# Altium PCB BQ24123 Recharger.PcbDoc
Units mil, origin at the board's own origin, x right, y up, seen from the top; angles counter-clockwise.
Board outline 2835 x 1670 mil, 2 copper layers (Top Layer, Bottom Layer); 25 components, 18 nets, 77 pads, 30 vias.
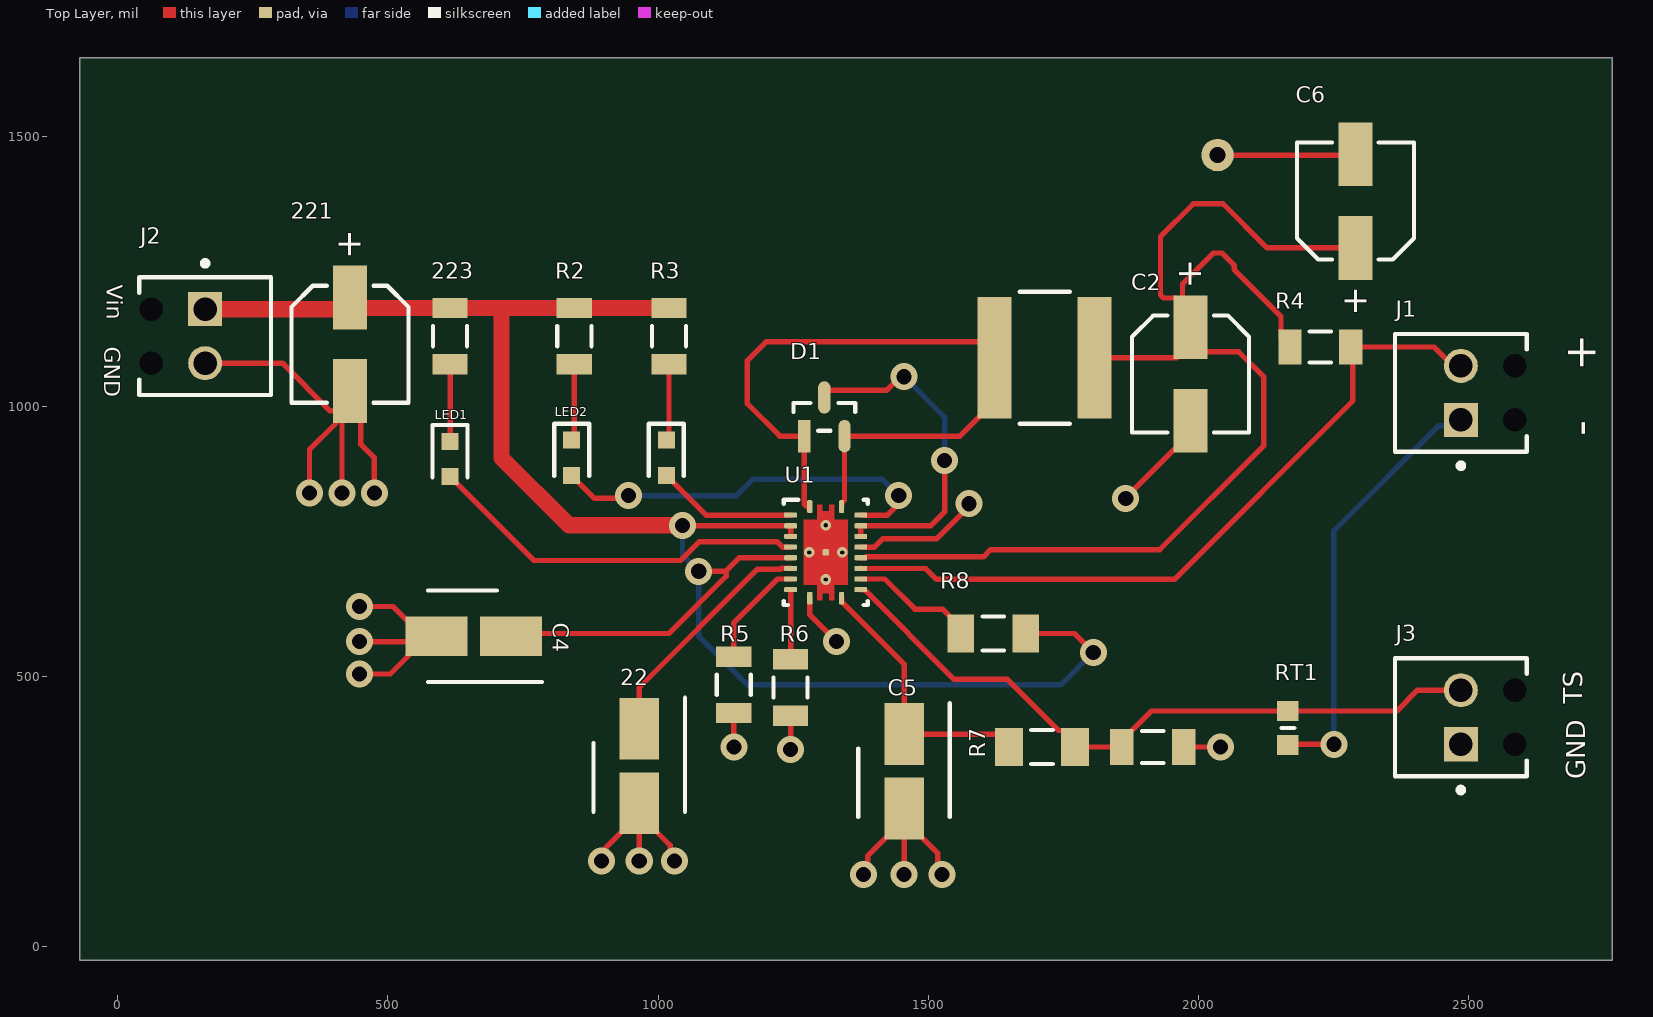
[diagram p0: Top Layer view]
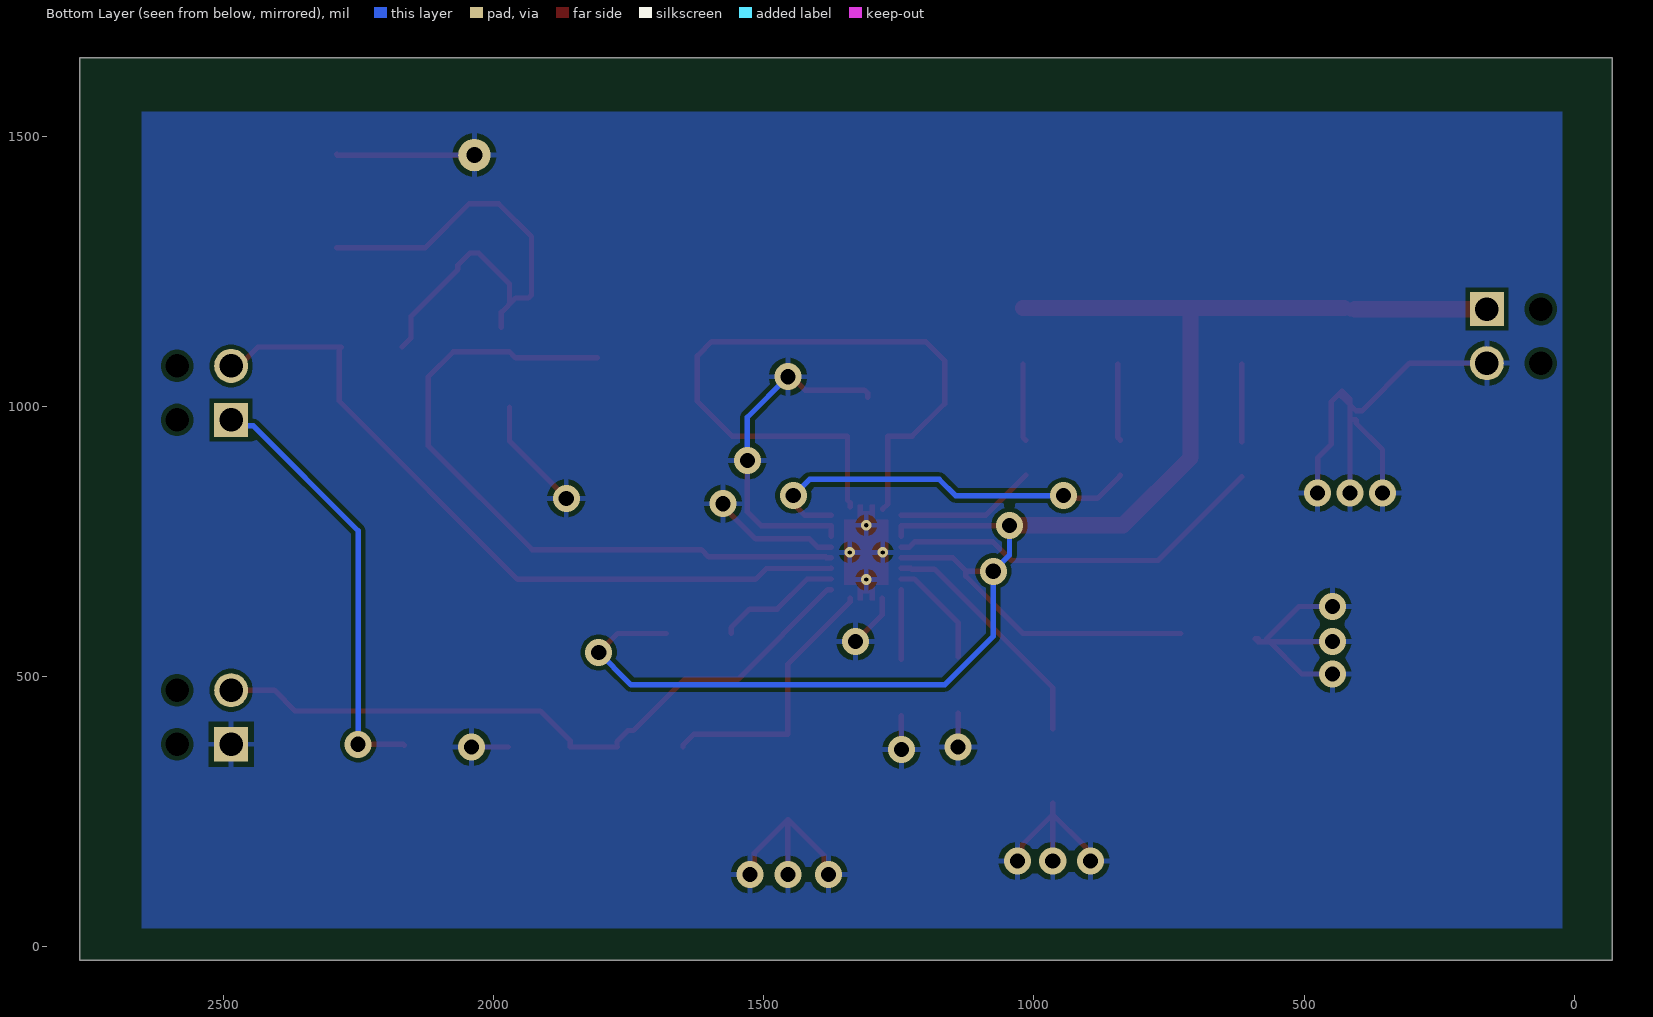
[diagram p1: Bottom Layer view, seen from below]
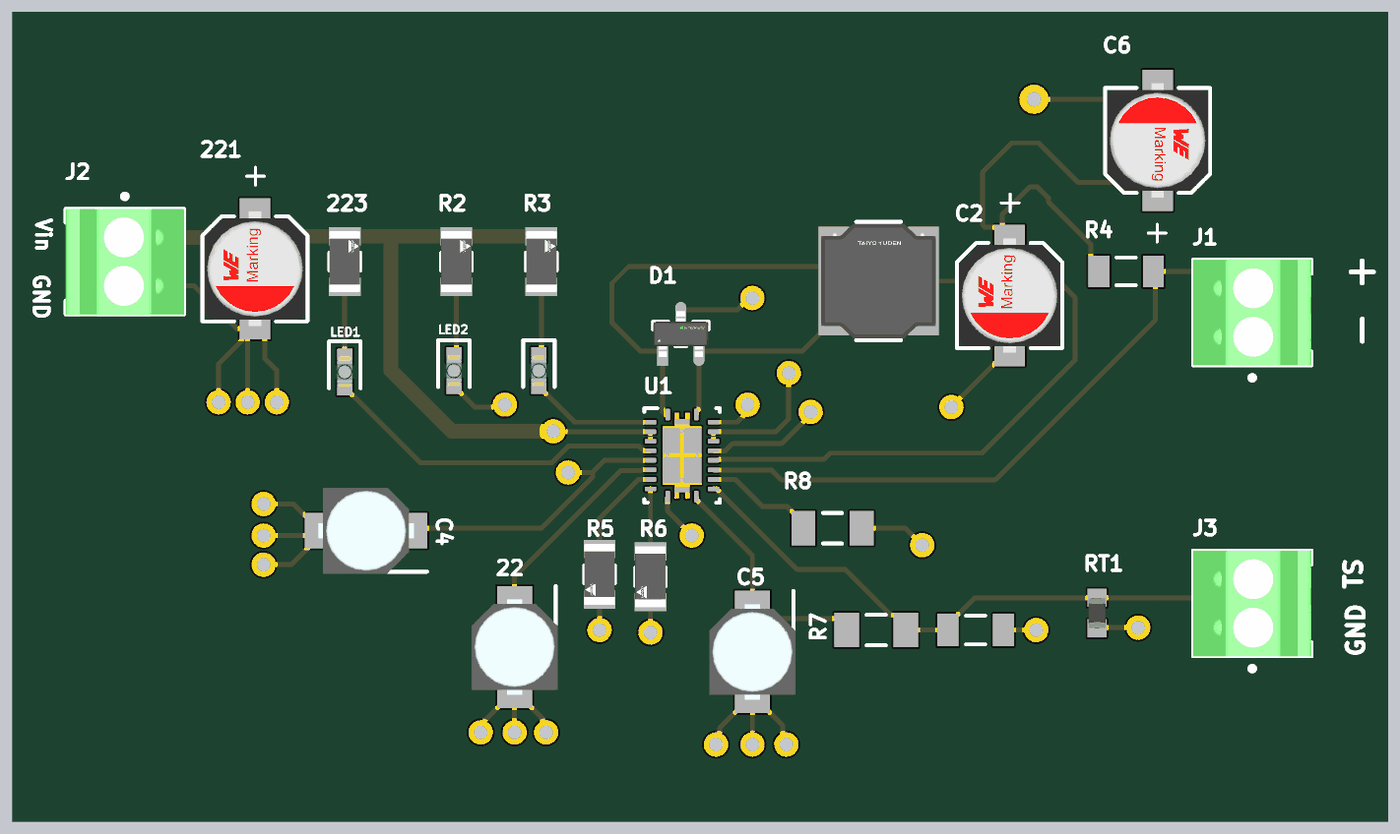
[diagram p2: 3D render of the assembled board from above, using the file's embedded part models]

## Layer stack, top to bottom
Top Solder: solder mask 0.4, Solder Resist, Dk 3.5
Top Layer: signal copper 1.4
Dielectric 1: dielectric 12.6, FR-4, Dk 4.8
Bottom Layer: signal copper 1.4
Bottom Solder: solder mask 0.4, Solder Resist, Dk 3.5

## Board outline
-70,-25 -70,1645 2765,1645 2765,-25

## Design rules (kind name [scope] priority, off if disabled: settings)
Clearance [All] p1: gap=8 ignorepadtopadclearanceinfootprint=FALSE
MinimumSolderMaskSliver [All] p1: minsoldermaskwidth=1
PolygonConnect [All] p1: connectstyle=Relief reliefconductorwidth=10 reliefentries=4 polygonreliefangle="90 Angle" airgapwidth=10
RoutingVias [All] p1: holewidth=28 width=50 viastyle="Through Hole" minholewidth=28 minwidth=50 maxholewidth=28 maxwidth=50
SilkToSilkClearance [All] p1: silktosilkclearance=0.5
SilkToSolderMaskClearance [IsPad] p1: minsilkscreentomaskgap=5 clearancetoexposedcopper=TRUE
SolderMaskExpansion [All] p1: expansion=4 istentingtop=FALSE
SupplyNets "Schematic Supply Nets_2" [InNet('PGND')] p1: voltage=0.000
SupplyNets "Schematic Supply Nets_1" [InNet('Battery Ground')] p2: voltage=0.000
Width [All] p1: maxlimit=40 minlimit=10 preferedwidth=10 minimp=50.000000 maximp=50.000000 favimp=50.000000
27 further rules are at their usual default settings.

## Classes and differential pairs
component class "BQ24123 Recharger": 22 223 C2 C4 C5 C6 D1 J1 J2 J3 LED1 LED2 R2 R3 R4 R5 R6 R7 R8 RT1 U1

## Components (designator, comment, footprint, x,y, rotation, side; value= is the part's Value field where it differs from the comment)
22 "UCB1V0R1MCL1GS" CAPAE430X730N 965,335 r270 top (schematic designator C3)
221 "865230542002" WCAP-AS5H_D5H5.5 430,1115 r90 top (schematic designator C?)
223 "CRCW12061K50FKEA" FP-CRCW1206-e3-IPC_C 615,1130 r90 top (schematic designator R1)
C2 "865230542002" WCAP-AS5H_D5H5.5 1985,1060 r90 top
C4 "UCB1V0R1MCL1GS" CAPAE430X730N 658.9,575 r180 top
C5 "UCB1V0R1MCL1GS" CAPAE430X730N 1455,325 r270 top
C6 "865230542002" WCAP-AS5H_D5H5.5 2290,1380 r270 top (schematic designator C?)
D1 "MMBZ18VALT1G" FP-318-08-IPC_B 1307.4,980.83 r90 top
J1 "1725656" PHOE-1725656-2 2485,1025 r90 top
J2 "1725656" PHOE-1725656-2 161.88,1130 r270 top
J3 "1725656" PHOE-1725656-2 2485,425 r90 top
L1 "NRS6045T100MMGK" FP-NR6045-MFG 1715,1090 r0 top
LED1 "APT1608CGCK" APT1608CGCK 615,902.52 r270 top
LED2 "APT1608CGCK" APT1608CGCK 840,905 r270 top
LED3 "APT1608CGCK" APT1608CGCK 1015,905 r270 top
R2 "CRCW12061K50FKEA" FP-CRCW1206-e3-IPC_C 845,1130 r90 top
R3 "CRCW12061K50FKEA" FP-CRCW1206-e3-IPC_C 1020,1130 r90 top
R4 "ERJ8BSFR10V" RESC3216X70X50NL05T20 2225,1110 r0 top
R5 "CRCW12067K50FKEA" FP-CRCW1206-e3-IPC_C 1140,485 r270 top
R6 "CRCW12067K50FKEA" FP-CRCW1206-e3-IPC_C 1245,480 r270 top
R7 "CRCW12069K31FKEA" RESC3216X60X45ML10T20 1710.11,370 r180 top
R8 "RC1206FR-0710KL" RESC3116X65X40ML10T20 1620,580 r0 top
RT1 "B57321V2103J060" THRMC1608X90N 2165,405 r90 top
U1 "BQ24123RHLR" RHL0020A_V 1310,730 r0 top
? "CRCW1206442KFKEA" RESC3216X60X45NL10T20 1915,370 r0 top

## Footprints (in the part's own frame and the unit in brackets; to place one, negate y for a bottom-side part, rotate by r counter-clockwise, add the part's x,y. Pads: shape width x height; smd on the part's side, far side on the other; paste and mask are expansions set on the pad)
APT1608CGCK [mm]
  rect 0.8x0.8 smd: 1(-0.825,0) 2(0.825,0)
  silkscreen extent -1.6,-0.82 0.85,0.82, body extent -0.8,-0.4 0.8,0.4, height 0.95
CAPAE430X730N [mm]
  rect 2.9x1.85 smd: 1(-1.75,0) 2(1.75,0)
  silkscreen extent -3.2,-2.15 2.15,2.15, body extent -2.5,-2.25 2.5,2.25, height 7.3
FP-318-08-IPC_B [mm]
  rect 1.524x0.578 smd paste+0 mask+0: 1(-0.91,0.95)
  rrect100% 1.524x0.578 smd paste+0 mask+0: 2(-0.91,-0.95) 3(0.91,0)
  silkscreen extent -0.65,-1.45 0.65,1.45, body extent -1.92,-1.7 1.92,1.7, height 0.25
FP-CRCW1206-e3-IPC_C [mil]
  rect 37.64x65.28 smd paste+0 mask+0: 1(-52.21,0) 2(52.21,0)
  silkscreen extent -19,-31 19,31, body extent -75,-38 75,38, height 10
FP-NR6045-MFG [mm]
  rect 1.6x5.7 smd paste+0 mask+0: 1(-2.35,0) 2(2.35,0)
  silkscreen extent -1.17,-3.1 1.17,3.1, body extent -3.25,-3.2 3.25,3.2, height 0.25
PHOE-1725656-2 [mm] "Connector, 2-Leads, Body 6.2x5.4mm, Pitch 2.54mm"
  rect 1.6x1.6 hole 1.1: 1(-1.27,0)
  round 1.6 hole 1.1: 2(1.27,0)
  round 0 hole 1.1 unplated: MH1(-1.27,-2.54) MH2(1.27,-2.54)
  silkscreen extent -3.54,-3.1 2.77,3.1, body extent -2.77,-3.1 2.77,3.1, height 9
RESC3116X65X40ML10T20 [mm] "Chip Resistor, 2-Leads, Body 3.10x1.60mm, IPC Low Density"
  rect 1.25x1.8 smd: 1(-1.525,0) 2(1.525,0)
  silkscreen extent -0.5,-0.8 0.5,0.8, body extent -1.6,-0.85 1.6,0.85, height 0.65
RESC3216X60X45ML10T20 [mm] "Chip Resistor, 2-Leads, Body 3.20x1.60mm, IPC Low Density"
  rect 1.3x1.8 smd: 1(-1.55,0) 2(1.55,0)
  silkscreen extent -0.5,-0.8 0.5,0.8, body extent -1.65,-0.85 1.65,0.85, height 0.6
RESC3216X60X45NL10T20 [mm] "Chip Resistor, 2-Leads, Body 3.20x1.60mm, IPC Medium Density"
  rect 1.1x1.7 smd: 1(-1.45,0) 2(1.45,0)
  silkscreen extent -0.5,-0.75 0.5,0.75, body extent -1.65,-0.85 1.65,0.85, height 0.6
RESC3216X70X50NL05T20 [mm] "Chip Resistor, 2-Leads, Body 3.20x1.60mm, IPC Medium Density"
  rect 1.1x1.65 smd: 1(-1.425,0) 2(1.425,0)
  silkscreen extent -0.5,-0.72 0.5,0.72, body extent -1.63,-0.82 1.62,0.82, height 0.7
RHL0020A_V [mm] "QFN, 20-Leads, Body 4.5x3.5mm, Pitch 0.5mm, Thermal Pad 3.05x2.05mm, TI Recommended"
  rrect42% 0.24x0.6 smd: 1(-0.75,2.15) 10(-0.75,-2.15) 11(0.75,-2.15) 20(0.75,2.15)
  rrect42% 0.6x0.24 smd: 2(-1.65,1.75) 3(-1.65,1.25) 4(-1.65,0.75) 5(-1.65,0.25) 6(-1.65,-0.25) 7(-1.65,-0.75) 8(-1.65,-1.25) 9(-1.65,-1.75) 12(1.65,-1.75) 13(1.65,-1.25) 14(1.65,-0.75) 15(1.65,-0.25) 16(1.65,0.25) 17(1.65,0.75) 18(1.65,1.25) 19(1.65,1.75)
  rrect33% 0.3x0.3 smd paste-0.15 mask+0: 21(0,0)
  Top Layer region: 0.16,2.25 0.16,1.925 -0.16,1.925 -0.16,2.25 -0.39,2.25 -0.39,1.525 -1.025,1.525 -1.025,-1.525 -0.39,-1.525 -0.39,-2.25 -0.16,-2.25 -0.16,-1.925 0.16,-1.925 0.16,-2.25 0.39,-2.25 0.39,-1.525 1.025,-1.525 1.025,1.525 0.39,1.525 0.39,2.25
  silkscreen extent -1.98,-2.47 1.98,2.47, body extent -1.82,-2.33 1.83,2.32, height 1.01
THRMC1608X90N [mm]
  rect 0.95x1 smd: 1(-0.8,0) 2(0.8,0)
  silkscreen extent 0,-0.3 0,0.3, body extent -0.8,-0.45 0.8,0.45, height 0.8
WCAP-AS5H_D5H5.5 [mm] "Aluminum Electrolytic Capacitors, 5x5.5mm"
  rect 3x1.6 smd: 1(2.2,0) 2(-2.2,0)
  silkscreen extent -2.75,-2.75 2.75,2.75, body extent -3,-2.65 3,2.65, height 5.5

## Part data
22 C4 C5: "Capacitor Polarised", Manufacturer_Name=Nichicon, Mouser Part Number=647-UCB1V0R1MCL1GS, Datasheet Link=http://www.nichicon.co.jp/english/products/pdfs/e-ucb.pdf, Height=7.3mm, Manufacturer_Part_Number=UCB1V0R1MCL1GS, Mouser Price/Stock=https://www.mouser.co.uk/ProductDetail/Nichicon/UCB1V0R1MCL1GS/?qs=Wu4QelNNmeOHrkSeva4QtA%3D%3D
221 C2 C6: library part CMP-03913-53914689-1, "865230542002 WCAP-AS5H Aluminum Electrolytic Capacitors", Capacitance=10µF, Case/Package=Radial, Insulation Resistance=10MΩ, Leakage Current=3.5µA, Max Operating Temperature=105°C, Min Operating Temperature=-40°C, Ripple Current=25mA, Tolerance=20%, Voltage Rating=35V, Diameter=5mm, Height=5.5mm, Height - Seated (Max)=5.5118mm, Length=5.5mm, Life (Hours)=5000hours, Mount="Surface Mount", NexarPartId=53914689, Packaging="Tape & Reel (TR)", Polarity=Polar, REACH SVHC=Unknown, Ripple Current (AC)=25mA, RoHS=Compliant, Voltage Rating (DC)=35V, Width=5.3mm
223 R2 R3: library part CMP-02407-002229-1, "RES Thick Film, 1.5kΩ, 1%, 0.25W, 100ppm/°C, 1206", Case Code (Imperial)=1206, Case Code (Metric)=3216, Max Operating Temperature=155°C, Max Power Dissipation=250mW, Min Operating Temperature=-55°C, Package Quantity=10, Resistance=1.5kR, Temperature Coefficient=100ppm/°C, Tolerance=1%, Voltage Rating=200V, Case/Package=1206, Composition="Thick Film", Contact Plating=Tin, Depth=1.6mm, Features="Automotive AEC-Q200", Height=0.024inch, Lead Free="Lead Free", Length=3.2mm, Military Standard=Not, Number of Terminations=2, Packaging="Tape and Reel", Power Rating=250mW, Radiation Hardening=No, Termination=SMD/SMT, Voltage Rating (DC)=200V, Weight=0.000353oz, Width=0.063inch
D1: library part CMP-1061-00637-2, "TVS DIODE 14.5V 25V SOT23-3", Breakdown Voltage=17.1V, Case/Package=SOT-23-3, Clamping Voltage=25V, Leakage Current=50nA, Max Breakdown Voltage=18.9V, Max Operating Temperature=150°C, Max Power Dissipation=225mW, Max Surge Current=1.6A, Min Operating Temperature=-55°C, Operating Supply Voltage=14.5V, Package Quantity=1, Peak Pulse Power=40W, Power Line Protection=No, Test Current=1mA, Voltage Rating (DC)=18V, Composition=Zener, Contact Plating=Tin, Depth=1.3mm, Direction=Unidirectional, Element Configuration="Common Anode", ESD Protection=Yes, Height=1.01mm, Lead Free="Lead Free", Length=2.9mm, Max Reverse Leakage Current=50nA, Min Breakdown Voltage=17.1V, Number Of Channels=2, Number of Elements=2, Number of Pins=3, Number of Unidirectional Channels=2, Packaging="Tape and Reel", Peak Pulse Current=1.6A, Polarity=Unidirectional, Power Dissipation=40W, Radiation Hardening=No, REACH SVHC="No SVHC", Reverse Breakdown Voltage=17.1V, Reverse Standoff Voltage=14.5V, Termination=SMD/SMT, Width=1.4mm, Working Voltage=14.5V
J1 J2 J3: library part CMP-2000-05299-1, "Male Header, Pitch 2.54 mm, 1 x 2 Position, Height 9 mm, Tail Length 3.5 mm", Colour=Green, Manufacturer="Phoenix Contact", Content=250pc(s), Datasheet URL=http://datasheet.octopart.com/1725656-Phoenix-Contact-datasheet-5302866.pdf, Datasheet Version=Apr-08, Industrial packaging=Yes, Manufacturer part No.=1725656, Manufacturer URL=http://www.phoenixcontact.com/, Number of contacts=2, Pitch=2.54mm, Type=MPT0,5/2-2,54
L1: library part CMP-14484-001321-1, "Shielded Wirewound Inductor 10uH 20% 2.8A 59.8mΩ SMD", Case/Package=Nonstandard, Current Rating=2.4A, DC Resistance (DCR)=59.8mR, Inductance=10uH, Inductance tolerance=20%, Max DC Current=3.1A, Max Operating Temperature=125°C, Min Operating Temperature=-25°C, Package Quantity=1500, Resistor Type=Wirewound, Self Resonant Frequency=12MHz, Test Frequency=100kHz, Core Material=Ferrite, Depth=6.2mm, Halogen Free="Halogen Free", Height=4.5mm, Height - Seated (Max)=0.177inch, Lead Free="Lead Free", Lead Pitch=4.7mm, Length=6mm, Mount="Surface Mount", Number of Pins=2, Packaging="Tape and Reel", Radiation Hardening=No, RMS Current (Irms)=2.4A, RoHS Compliant=Yes, Saturation Current=3.1A, Series=NRS, Shielding=Shielded, Termination=SMD/SMT, Tolerance=20%, Width=0.236inch
LED1 LED2 LED3: "LED", Manufacturer_Name=Kingbright, Mouser Part Number=604-APT1608CGCK, Arrow Part Number=APT1608CGCK, Arrow Price/Stock=https://www.arrow.com/en/products/apt1608cgck/kingbright?region=nac, Datasheet Link=https://componentsearchengine.com/Datasheets/1/APT1608CGCK.pdf, Height=0.75mm, Manufacturer_Part_Number=APT1608CGCK, Mouser Price/Stock=https://www.mouser.co.uk/ProductDetail/Kingbright/APT1608CGCK?qs=VdjlWU%2FzoOFSew86JUt6QA%3D%3D
R4: library part CMP-2003-00761-1, Manufacturer=Panasonic, Part Number=ERJ8BSFR10V
R5 R6: library part CMP-2003-02388-2, "RES Thick Film, 7.5kΩ, 1%, 0.25W, 100ppm/°C, 1206", Case Code (Imperial)=1206, Case Code (Metric)=3216, Max Operating Temperature=155°C, Max Power Dissipation=250mW, Min Operating Temperature=-55°C, Package Quantity=10, Resistance=7.5kR, Resistance Tolerance=1%, Resistor Type="Thick Film", Temperature Coefficient=100ppm/°C, Voltage Rating=200V, Case/Package=1206, Construction=Rectangular, Contact Plating=Tin, Depth=1.6mm, Features="Automotive AEC-Q200", Height=0.55mm, Lead Free="Lead Free", Length=3.2mm, Military Standard=Not, Number of Terminations=2, Packaging="Tape and Reel", Power Rating=250mW, Radiation Hardening=No, RoHS Compliant=Yes, Series=CRCW, Technology="THICK FILM", Termination=SMD/SMT, Tolerance=1%, Voltage Rating (DC)=200V, Weight=0.000353oz, Width=0.063inch, Working Voltage=200V
R7: library part CMP-2003-02443-1, Manufacturer="Vishay Dale", Part Number=CRCW12069K31FKEA
R8: library part CMP-1014-00623-2, "Chip Resistor, 10 KOhm, +/- 1%, 0.25 W, -55 to 155 degC, 1206 (3216 Metric), RoHS, Tape and Reel", Case Code (Imperial)=1206, Case Code (Metric)=3216, Manufacturer=Yageo, Max Operating Temperature=155degC, Min Operating Temperature=-55degC, Package Description="2-Pin Surface Mount Device, Body 3.1 x 1.6 mm", Package Quantity=5000, Package Reference=1206.0, Power Rating=250mW, Resistance=10KOhm, Temperature Coefficient=100ppm/degreesC, Tolerance=1%, Voltage Rating=200V, Case/Package=1206, Composition=ThickFilm, Datasheet URL=http://www.yageo.com/NewPortal/yageodocoutput?fileName=/pdf/R-Chip/PYu-RC_Group_51_RoHS_L_5.pdf, Datasheet Version="Rev. 5, 10/2016", Depth=1.6mm, Height=0.55mm, Lead Free=LeadFree, Length=3.1mm, Manufacturer URL=http://www.yageo.com/, Military Standard=Not, Packaging=TapeandReel, REACH SVHC=Unknown, RoHSCompliant=true, Termination=SMD/SMT, Width=1.6mm
RT1: "Thermistor", Manufacturer_Name=TDK, Mouser Part Number=871-B57321V2103J060, Arrow Part Number=B57321V2103J060, Arrow Price/Stock=https://www.arrow.com/en/products/b57321v2103j060/epcos-tdk, Datasheet Link=https://product.tdk.com/system/files/dam/doc/product/sensor/ntc/chip-ntc-thermistor/data_sheet/50/db/ntc/ntc_smd_standard_series_0603.pdf, Height=0.9mm, Manufacturer_Part_Number=B57321V2103J060
U1: library part CMP-0321-00131-2, "Synchronous Switch-Mode 2-Cell Li-Ion Charger with 2 A FET, Enhanced EMI Performance, 4.3 V, -40 to 85 degC, 20-pin QFN (RHL), Green (RoHS & no Sb/Br)", Manufacturer="Texas Instruments", Over Voltage Protection=N, ComponentLink1Description=Datasheet, ComponentLink1URL=http://www.ti.com/general/docs/lit/getliterature.tsp?genericPartNumber=BQ24123&fileType=pdf, DatasheetVersion=SLUS688G, Eco-Plan="Green (RoHS & no Sb/Br)", Lead Acid=N, Li-Ion=Y, Li-Polymer=Y, Mounting Technology="Surface Mount", NiCd=N, NiMH=N, PackageDescription="20-Leads Plastic Quad Flatpack No-Lead, 4.5 x 3.5 x 0.9 mm Body, 0.5 mm Pitch, Exposed Pad", PackageReference=RHL0020A, PackageVersion="revJ, Dec-2011", PartNumber=BQ24123RHLR, SubFamily="Battery Charge Management", Vin(Min)(V)=4.3
?: library part CMP-2003-02197-1, Manufacturer="Vishay Dale", Part Number=CRCW1206442KFKEA

## Free pads (board coordinates)
  round 60 hole 30: 3(2035,1465)

## Via types
v1: diameter 50, hole 28, Top Layer to Bottom Layer, 26 vias
v2: diameter 19.68, hole 7.87, Top Layer to Bottom Layer, 4 vias

## Nets (pads, with @x,y where several pads share a name; then routed paths per layer and width w, separated by ;. In a path a pad name is that pad's centre, name@x,y a point inside that pad or via, vN(x,y) a via of type N, cw(c..) or ccw(c..) an arc to the next point about the centre after c; other vN are vias at no path point)
"Battery Ground": J1.1 RT1.1 | length 800.5
  Top Layer w10: RT1.1 2166.5,375 v1(2250,375)
  Bottom Layer w10: v1(2250,375) 2250,770 2444.36,964.36 2474.36,964.36 J1.1
NetC2_1: C2.1 C6.1 L1.2 R4.1 U1.15 | length 2279
  Top Layer w10: U1.15 1375.24,720.43 1383.93,720.43 1385.34,721.84 1601.84,721.84 1615,735 1927.96,735 2120,927.04 2120,1055 2073.82,1101.18 1970,1101.18 1958.82,1090 L1.2 ; C2.1@1970,1189.17 1970,1226.69 2027.13,1283.82 2042.87,1283.82 2065.43,1261.26 2065.43,1253.39 2152.24,1166.57 2152.24,1126.65 R4.1 ; C2.1 1985,1174.17 1958.5,1200.67 1935.19,1200.67 1929.33,1206.53 1929.33,1314.33 1990,1375 2045,1375 2126.61,1293.39 C6.1
NetC3_1: 22.1 U1.7 | length 447.5
  Top Layer w10: 22.1 965,480 1184.06,699.06 1225.94,699.06 1227.35,700.47 U1.7
NetD1_1: D1.1 D1.2 L1.1 U1.1 U1.20 | length 1352.9
  Top Layer w10: U1.1@1279.65,810 1270,819.65 D1.1 1225,945 1165,1005 1165,1085 1200,1120 1595.98,1120 1622.48,1093.5 L1.1 1622.48,1009.29 1558.19,945 D1.2 1344.8,826.45 1339.53,821.18 U1.20
NetLED1_1: 223.1 LED1.1 | length 142.8
  Top Layer w10: LED1.1 223.1
NetLED1_2: LED1.2 U1.5 | length 713
  Top Layer w10: LED1.2 770.04,715 1041.07,715 1076.07,750 1220,750 1230.16,739.84 U1.5
NetLED2_1: LED2.1 R2.1 | length 142.4
  Top Layer w10: LED2.1 845,942.48 R2.1
NetLED2_2: LED2.2 U1.19 | length 743.3
  Top Layer w10: LED2.2 882.52,830 940,830 v1(945,835) ; U1.19 1423.89,798.89 1437.35,812.35 1437.35,827.35 v1(1445,835)
  Bottom Layer w10: v1(945,835) 1145,835 1175,865 1415,865 v1(1445,835)
NetLED3_1: LED3.1 R3.1 | length 142.4
  Top Layer w10: LED3.1 1020,942.48 R3.1
NetLED3_2: LED3.2 U1.2 | length 260.5
  Top Layer w10: LED3.2 1088.63,798.89 U1.2
NetR5_1: R5.1 U1.8 | length 201.3
  Top Layer w10: R5.1 1140,600 1220.78,680.78 U1.8
NetR6_1: R6.1 U1.9 | length 128.9
  Top Layer w10: R6.1 R6.1 U1.9
NetR8_1: R8.1 U1.13 | length 233.1
  Top Layer w10: U1.13 1419.22,680.78 1475,625 1525.79,625 1559.96,590.83 R8.1
PGND: 22.2 221.2 ?.2 C2.2 C4.2 C5.2 C6.2 D1.3 J2.2 J3.1 pad.3 R5.2 R6.2 U1.10 U1.16 U1.17 U1.18 U1.21 | length 3683.5
  Top Layer w10: J2.2@180,1080 305,1080 393.31,991.69 403.5,991.69 221.2@430,1018.19 ; v1(355,840) 355,919.94 403.5,968.44 403.5,974.33 404.24,975.07 221.2@415,975.07 ; v1(415,840) 221.2@415,975.07 ; 221.2@415,985.83 221.2@415,975.07 ; v1(447.8,504.95) 504.33,504.95 564.33,564.95 C4.2@569.33,564.95 ; v1(447.8,564.95) C4.2@569.33,564.95 ; v1(447.8,629.95) 509.33,629.95 C4.2@569.33,569.95 ; v1(475,840) 475,905 450,930 450,1008.39 221.2 ; C4.2@585,569.95 590,569.95 585,564.95 C4.2@569.33,564.95 ; v1(895,158.9) 902.65,166.55 902.65,183.09 22.2@965,245.43 ; v1(965,158.9) 22.2@965,245.43 ; 22.2 22.2@965,245.43 ; v1(1030,158.9) 1022.35,166.55 1022.35,188.09 22.2@965,245.43 ; v1(1140,370) R5.2 ; v1(1245,365) R6.2 ; U1.10 1280.48,614.52 v1(1330,565) ; D1.3 1307.4,1024.4 1313.29,1030.3 1423.14,1030.3 1447.84,1055 v1(1455,1055) ; U1.16 1399.84,739.84 1415,755 1515,755 1575,815 v1(1575,820) ; U1.17 U1.18 1504.21,779.21 1530,805 v1(1530,900) ; v1(1380,133.9) 1387.65,141.55 1387.65,168.09 C5.2@1455,235.43 ; v1(1455,133.9) C5.2@1455,235.43 ; v1(1525,133.9) 1517.35,141.55 1517.35,173.09 C5.2@1455,235.43 ; v1(1865,830) 1865,830.83 1970,935.83 C2.2@1970,998.82 ; ?.2 v1(2040,370) ; pad.3 2288.39,1465 C6.2 ; 221.2@415,975.07 221.2@415,1003.19 ; 221.2@415,1003.19 221.2@430,1018.19 ; 221.2@415,1003.19 415,1013.39 221.2 ; 221.2@430,1018.19 221.2
  Bottom Layer w10: v1(1455,1055) 1530,980 v1(1530,900)
  other v2: 1310,679.8 1279.49,730 1340.51,730 1310,780.2
TS: ?.1 J3.2 R7.1 RT1.2 U1.12 | length 1286.9
  Top Layer w10: U1.12 1381.5,661.1 1547.6,495 1646.13,495 1740.7,400.43 1750.54,400.43 1771.13,379.84 R7.1 ; R7.1@1771.02,370 ?.1 1857.91,381.81 1912.6,436.5 RT1.2 2366.5,436.5 2405,475 J3.2
Vbat: J1.2 R4.2 U1.14 | length 1375.2
  Top Layer w10: U1.14 1375.24,700.19 1494.81,700.19 1515,680 1955,680 2285,1010 2285,1106.1 R4.2 2435.66,1110 2470.66,1075 J1.2
Vin: 221.1 223.2 C4.1 J2.1 R2.2 R3.2 R8.2 U1.3 U1.4 U1.6 | length 3520.2
  Top Layer w10: 221.1@406.18,1180 415,1171.18 221.1@426.03,1182.21 ; C4.1@727.8,580 1020,580 1125.86,685.86 1125.86,694.14 1125,695 ; v1(1045,780) 1045.79,779.21 U1.3 U1.4 ; v1(1075,695) 1125,695 ; U1.6 1150.15,720.15 1125,695 ; R8.2 1770,580 v1(1805,545)
  Top Layer w30: J2.1@180,1180 221.1@406.18,1180 ; 221.1@426.03,1182.21 223.2 710,1182.21 ; R3.2 R2.2 710,1182.21 ; v1(1045,780) 835,780 710,905 710,1182.21
  Bottom Layer w10: v1(1045,780) 1045,725 v1(1075,695) 1075,575 1165,485 1745,485 v1@1810,550
VTSB: C5.1 R7.2 U1.11 | length 505.2
  Top Layer w10: U1.11 1339.53,638.82 1455,523.35 C5.1 1628.49,393.9 1649.08,373.31 R7.2
pads on no net: J1.MH1 J1.MH2 J2.MH1 J2.MH2 J3.MH1 J3.MH2

## Polygon pours and split planes (outlines as drawn)
PGND on Bottom Layer "PGND_L02_P000" (solid, pour order 0): 22,1545 22,35 2650,35 2650,1545

## Silkscreen, mask and mechanical layers (free items; w line width, h text height)
Top Overlay:
  text "Vin" at -20,1225 h30 r270
  text "GND" at -25,1110 h30 r270
  text "+" at 2735,1065 h60 r90
  text "-" at 2734.99,945 h60 r90
  text "TS" at 2710,450 h35 r90
  text "GND" at 2715,310 h35 r90
Mechanical 1:
  the board outline again, w10

## Text inside footprints (layer, text, board x,y; h text height)
221: Top Overlay "+" at 449.68,1272.48 h48 r90
C2: Top Overlay "+" at 2004.68,1217.48 h48 r90
C6: Top Overlay "+" at 2270.32,1222.52 h48 r270